# Altium PCB batteryAdapterBoard_r001.PcbDoc
Units mm, origin at the board's own origin, x right, y up, seen from the top; angles counter-clockwise.
Board outline 115 x 70 mm, 2 copper layers (Top Layer, Bottom Layer), stack 1.671 mm thick; 4 components, 12 nets, 50 pads, 11 vias.
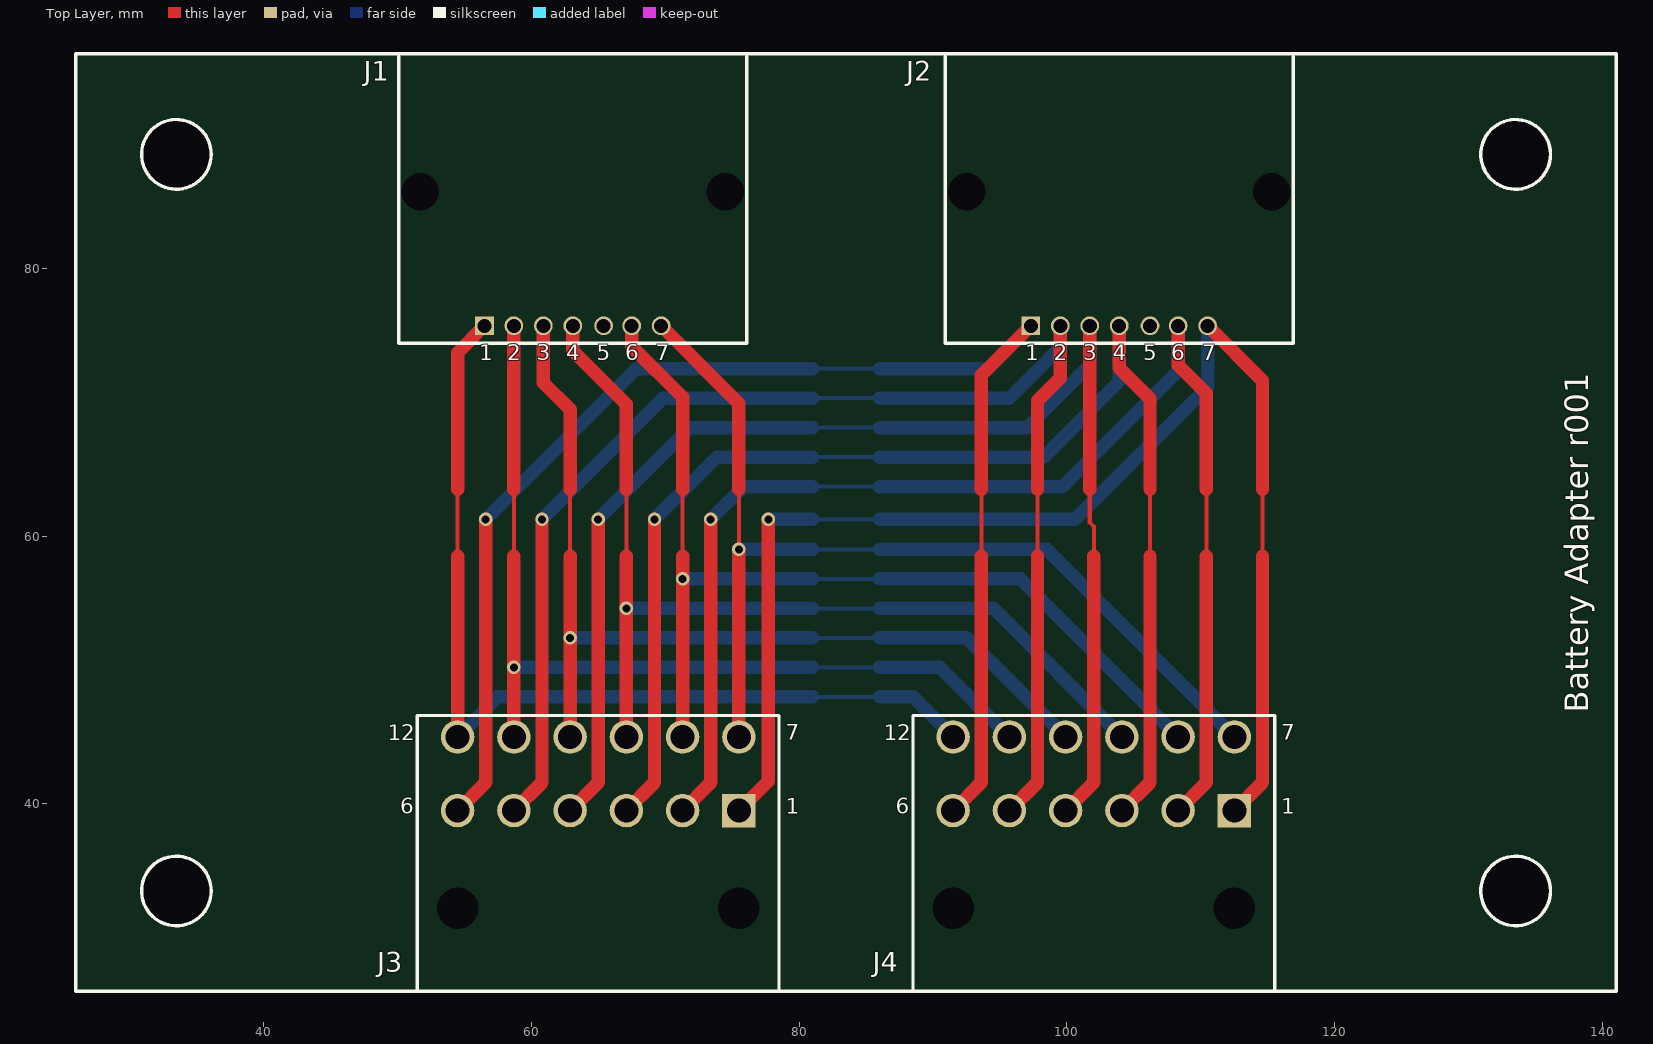
[diagram p0: Top Layer view]
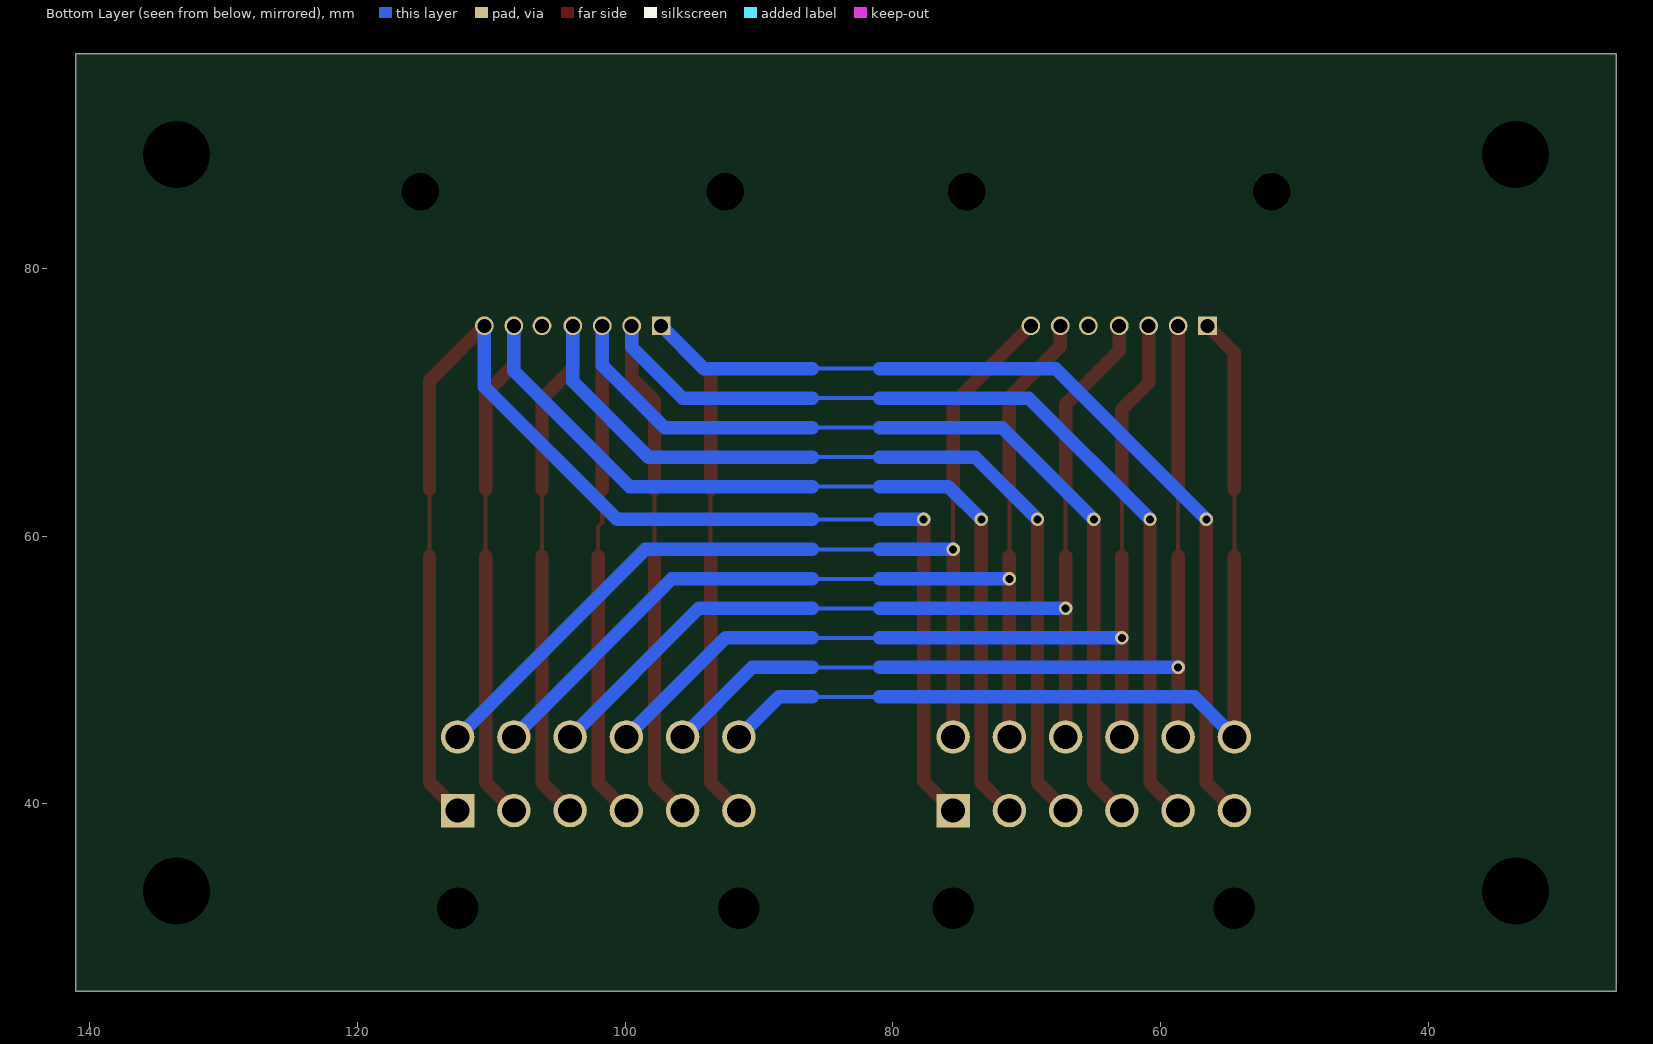
[diagram p1: Bottom Layer view, seen from below]
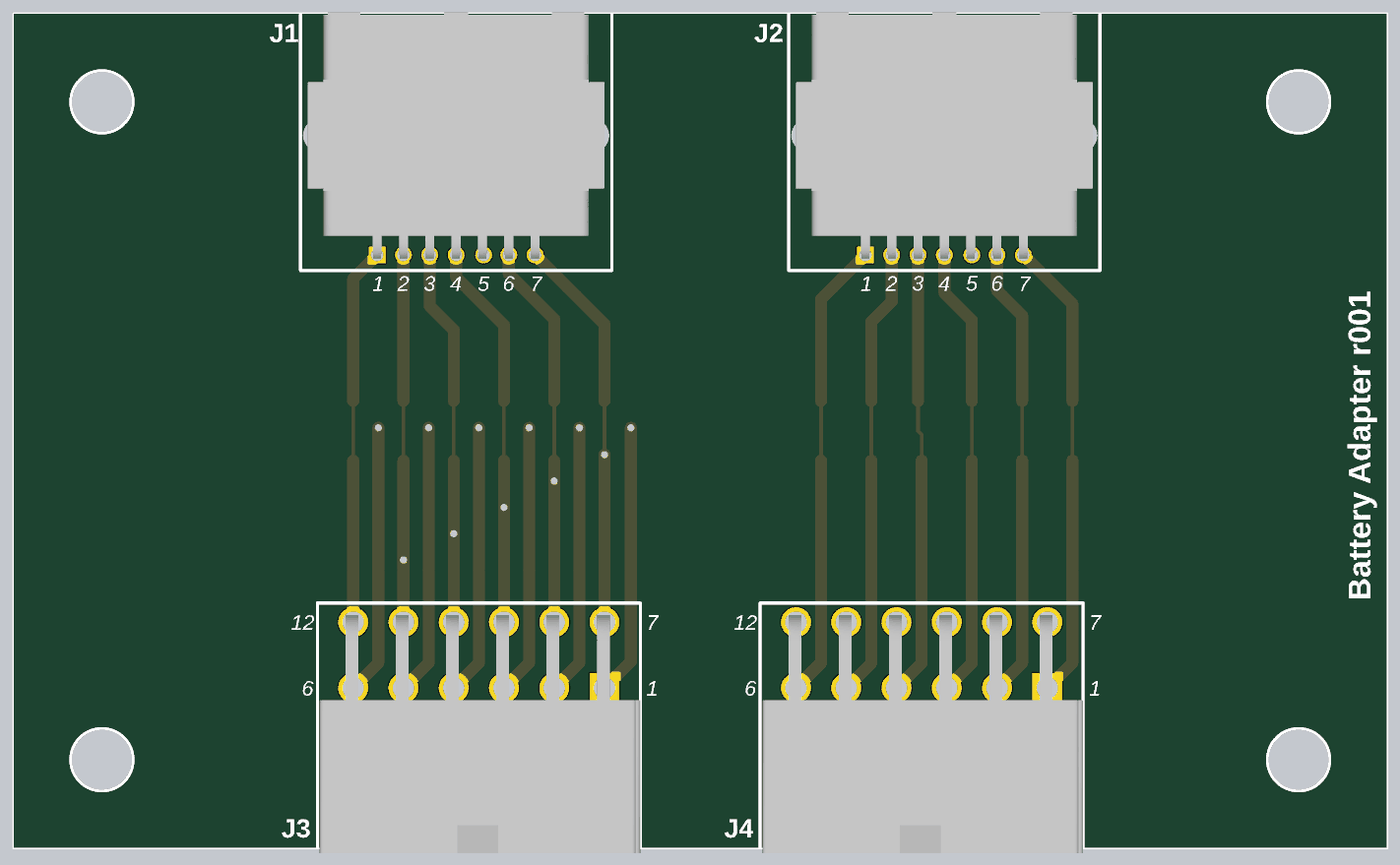
[diagram p2: 3D render of the assembled board from above, using the file's embedded part models]

## Layer stack, top to bottom
Top Solder: solder mask 0.0102, Solder Resist, Dk 3.5
Top Layer: signal copper 0.0356
Dielectric 1: dielectric 1.6, FR-4, Dk 4.8
Bottom Layer: signal copper 0.0356
Bottom Solder: solder mask 0.0102, Solder Resist, Dk 3.5

## Board outline
26,26 141,26 141,96 26,96

## Design rules (kind name [scope] priority, off if disabled: settings)
Clearance [All] p1: gap=0.35 ignorepadtopadclearanceinfootprint=FALSE except(1.1: Arc-Arc Arc-Track Track-Track)
PolygonConnect [All] p1: connectstyle=Relief reliefconductorwidth=0.254 reliefentries=4 polygonreliefangle="90 Angle" airgapwidth=0.254
RoutingVias [All] p1: holewidth=0.6 width=1.2 viastyle="Through Hole" minholewidth=0.6 minwidth=1 maxholewidth=0.6 maxwidth=1.2
SolderMaskExpansion [All] p1: expansion=0.102
Width [All] p1: maxlimit=1 minlimit=0.2 preferedwidth=1
30 further rules are at their usual default settings.

## Components (designator, comment, footprint, x,y, rotation, side; value= is the part's Value field where it differs from the comment)
J1 "MX34007NF1" MX34007NF1 63.1,75.7 r180 top
J2 "MX34007NF1" MX34007NF1 103.9,75.7 r180 top
J3 "26013119" 26013119 65,38.6 r0 top
J4 "26013119" 26013119 102,38.6 r0 top

## Footprints (in the part's own frame and the unit in brackets; to place one, negate y for a bottom-side part, rotate by r counter-clockwise, add the part's x,y. Pads: shape width x height; smd on the part's side, far side on the other; paste and mask are expansions set on the pad)
26013119 [mm]
  round 0 hole 3.1 unplated: 0(-10.5,-6.4) 0(10.5,-6.4)
  rect 2.5x2.5 hole 1.8 unplated: 1(10.5,0.9)
  round 2.5 hole 1.8 unplated: 2(6.3,0.9) 3(2.1,0.9) 4(-2.1,0.9) 5(-6.3,0.9) 6(-10.5,0.9) 7(10.5,6.4) 8(6.3,6.4) 9(2.1,6.4) 10(-2.1,6.4) 11(-6.3,6.4) 12(-10.5,6.4)
  silkscreen extent -13.5,-12.5 13.5,8, body extent -13.3,-12.93 13.5,7, height 11.4
MX34007NF1 [mm]
  round 1.3 hole 2.8 unplated: 0(-11.4,-10) 0(11.4,-10)
  rect 1.4x1.4 hole 1.05 unplated: 1(6.6,0)
  round 1.4 hole 1.05 unplated: 2(4.4,0) 3(2.2,0) 4(0,0) 5(-2.3,0) 6(-4.4,0) 7(-6.6,0)
  silkscreen extent -13,-20.1 13,1.3, body extent -12.4,-20.3 12.4,0.32, height 10.7

## Free pads (board coordinates)
  round 0 hole 5 unplated: 0(33.5,33.5) 0(33.5,88.5) 0(133.5,33.5) 0(133.5,88.5)

## Via types
v1: diameter 1, hole 0.6, Top Layer to Bottom Layer, tented both sides, 11 vias

## Nets (pads, with @x,y where several pads share a name; then routed paths per layer and width w, separated by ;. In a path a pad name is that pad's centre, name@x,y a point inside that pad or via, vN(x,y) a via of type N, cw(c..) or ccw(c..) an arc to the next point about the centre after c; other vN are vias at no path point)
NetJ1_1: J1.1 J3.12 J4.12 | length 71
  Top Layer w0.3: 54.5,58.5 54.5,63.5
  Top Layer w1: J3.12 54.5,58.5 ; 54.5,63.5 54.5,73.7 J1.1
  Bottom Layer w0.3: 81,48 86,48
  Bottom Layer w1: J3.12 57.5,48 81,48 ; 86,48 88.5,48 J4.12
NetJ1_2: J1.2 J3.11 J4.11 | length 69.9
  Top Layer w0.3: 58.7,58.5 58.7,63.5
  Top Layer w1: J3.11 v1(58.7,50.2) 58.7,58.5 ; 58.7,63.5 J1.2
  Bottom Layer w0.3: 81,50.2 86,50.2
  Bottom Layer w1: v1(58.7,50.2) 81,50.2 ; 86,50.2 90.5,50.2 J4.11
NetJ1_3: J1.3 J3.10 J4.10 | length 71.6
  Top Layer w0.3: 62.9,58.5 62.9,63.5
  Top Layer w1: J1.3 60.9,71.45 62.9,69.45 62.9,63.5 ; J3.10 v1(62.9,52.4) 62.9,58.5
  Bottom Layer w0.3: 81,52.4 86,52.4
  Bottom Layer w1: v1(62.9,52.4) 81,52.4 ; 86,52.4 92.5,52.4 J4.10
NetJ1_4: J1.4 J3.9 J4.9 | length 73.4
  Top Layer w0.3: 67.1,58.5 67.1,63.5
  Top Layer w1: J1.4 63.1,73.85 67.1,69.85 67.1,63.5 ; J3.9 v1(67.1,54.6) 67.1,58.5
  Bottom Layer w0.3: 81,54.6 86,54.6
  Bottom Layer w1: J1.4 J1.4@63.177,75.623 ; v1(67.1,54.6) 81,54.6 ; 86,54.6 94.5,54.6 J4.9
NetJ1_6: J1.6 J3.8 J4.8 | length 74.2
  Top Layer w0.3: 71.3,58.5 71.3,63.5
  Top Layer w1: J1.6 67.5,74.15 71.3,70.35 71.3,63.5 ; J3.8 v1(71.3,56.8) 71.3,58.5
  Bottom Layer w0.3: 81,56.8 86,56.8
  Bottom Layer w1: v1(71.3,56.8) 81,56.8 ; 86,56.8 96.5,56.8 J4.8
NetJ1_7: J1.7 J3.7 J4.7 | length 75.9
  Top Layer w0.3: v1(75.5,59) 75.5,63.5
  Top Layer w1: J1.7 75.5,69.9 75.5,63.5 ; J3.7 v1(75.5,59)
  Bottom Layer w0.3: 81,59 86,59
  Bottom Layer w1: v1(75.5,59) 81,59 ; 86,59 98.5,59 J4.7
NetJ2_1: J2.1 J3.6 J4.6 | length 107.9
  Top Layer w0.3: 93.6,58.5 93.6,63.5
  Top Layer w1: J3.6 56.6,41.6 v1(56.6,61.25) ; J4.6 93.6,41.6 93.6,58.5 ; 93.6,63.5 93.6,72 J2.1
  Bottom Layer w0.3: 81,72.5 86,72.5
  Bottom Layer w1: v1(56.6,61.25) 67.85,72.5 81,72.5 ; 86,72.5 94.1,72.5 J2.1
NetJ2_2: J2.2 J3.5 J4.5 | length 106
  Top Layer w0.3: 97.8,58.5 97.8,63.5
  Top Layer w1: J3.5 60.8,41.6 v1(60.8,61.25) ; J4.5 97.8,41.6 97.8,58.5 ; 97.8,63.5 97.8,70.1 99.5,71.8 J2.2
  Bottom Layer w0.3: 81,70.294 86,70.294
  Bottom Layer w1: v1(60.8,61.25) 69.844,70.294 81,70.294 ; 86,70.294 95.694,70.294 99.5,74.1 J2.2
NetJ2_3: J2.3 J3.4 J4.4 | length 104.2
  Top Layer w0.3: 101.7,63.5 101.7,61 102,60.7 102,58.5
  Top Layer w1: J3.4 65,41.6 v1(65,61.25) ; J4.4 102,41.6 102,58.5 ; 101.7,63.5 J2.3
  Bottom Layer w0.3: 81,68.094 86,68.094
  Bottom Layer w1: v1(65,61.25) 71.844,68.094 81,68.094 ; 86,68.094 97.044,68.094 101.7,72.75 J2.3
NetJ2_4: J2.4 J3.3 J4.3 | length 103.8
  Top Layer w0.3: 106.2,58.5 106.2,63.5
  Top Layer w1: J3.3 69.2,41.6 v1(69.2,61.25) ; J2.4 103.9,72.55 106.2,70.25 106.2,63.5 ; J4.3 106.2,41.6 106.2,58.5
  Bottom Layer w0.3: 81,65.894 86,65.894
  Bottom Layer w1: v1(69.2,61.25) 73.844,65.894 81,65.894 ; 86,65.894 98.244,65.894 103.9,71.55 J2.4
NetJ2_6: J2.6 J3.2 J4.2 | length 103.2
  Top Layer w0.3: 110.4,58.5 110.4,63.5
  Top Layer w1: J3.2 73.4,41.6 v1(73.4,61.25) ; J4.2 110.4,41.6 110.4,58.5 ; J2.6@108.3,75.5 108.3,72.75 110.4,70.65 110.4,63.5
  Bottom Layer w0.3: 81,63.694 86,63.694
  Bottom Layer w1: v1(73.4,61.25) 75.844,63.694 81,63.694 ; 86,63.694 99.644,63.694 108.3,72.35 J2.6
NetJ2_7: J2.7 J3.1 J4.1 | length 102.9
  Top Layer w0.3: 114.6,58.5 114.6,63.5
  Top Layer w1: J3.1 77.7,41.7 v1(77.7,61.25) ; J2.7 114.6,71.6 114.6,63.5 ; J4.1 114.6,41.6 114.6,58.5
  Bottom Layer w0.3: 81,61.25 86,61.25
  Bottom Layer w1: v1(77.7,61.25) 81,61.25 ; 86,61.25 100.6,61.25 110.5,71.15 J2.7
pads on no net: J1.0 J1.5 J2.0 J2.5 J3.0 J4.0

## Silkscreen, mask and mechanical layers (free items; w line width, h text height)
Top Overlay:
  circle w0.254: c33.5,33.5 r2.6
  circle w0.254: c133.5,33.5 r2.6
  circle w0.254: c133.5,88.5 r2.6
  circle w0.254: c33.5,88.5 r2.6
  lines w0.254: 26,26 26,96 141,96 141,26 26,26
  text "3" at 101.2,72.722 h2
  text "5" at 105.7,72.722 h2
  text "6" at 107.8,72.722 h2
  text "1" at 56.1,72.7 h2
  text "2" at 58.2,72.7 h2
  text "3" at 60.4,72.7 h2
  text "4" at 62.6,72.7 h2
  text "5" at 64.9,72.7 h2
  text "6" at 67,72.7 h2
  text "7" at 69.3,72.7 h2
  text "1" at 96.9,72.7 h2
  text "2" at 99,72.7 h2
  text "4" at 103.4,72.7 h2
  text "7" at 110.1,72.7 h2
  text "Battery Adapter r001" at 139.5,46.8 h3 r90
  text "7" at 79,44.368 h2
  text "7" at 116,44.368 h2
  text "12" at 49.3,44.357 h2
  text "12" at 86.3,44.357 h2
  text "6" at 50.2,38.868 h2
  text "1" at 79,38.857 h2
  text "6" at 87.2,38.868 h2
  text "1" at 116,38.857 h2
Board:
  the board outline again, w0.254
Drill Drawing:
  the board outline again, w0.254

## Dimensions
33.5,33.5 to 33.5,88.5 on Dimensions
33.5,33.5 to 133.5,33.5 on Dimensions
33.5,33.5 to 26,26 on Dimensions
33.5,33.5 to 26,26 on Dimensions
26,26 to 141,26 on Dimensions
26,26 to 26,96 on Dimensions